# Altium PCB Complete_PCB.PcbDoc
Units mil, origin at the board's own origin, x right, y up, seen from the top; angles counter-clockwise.
Board outline 6000 x 4000 mil, 2 copper layers (Top Layer, Bottom Layer); 4 components, 12 nets, 67 pads, 0 vias.
Unrouted connection lines stored in the file: 21.
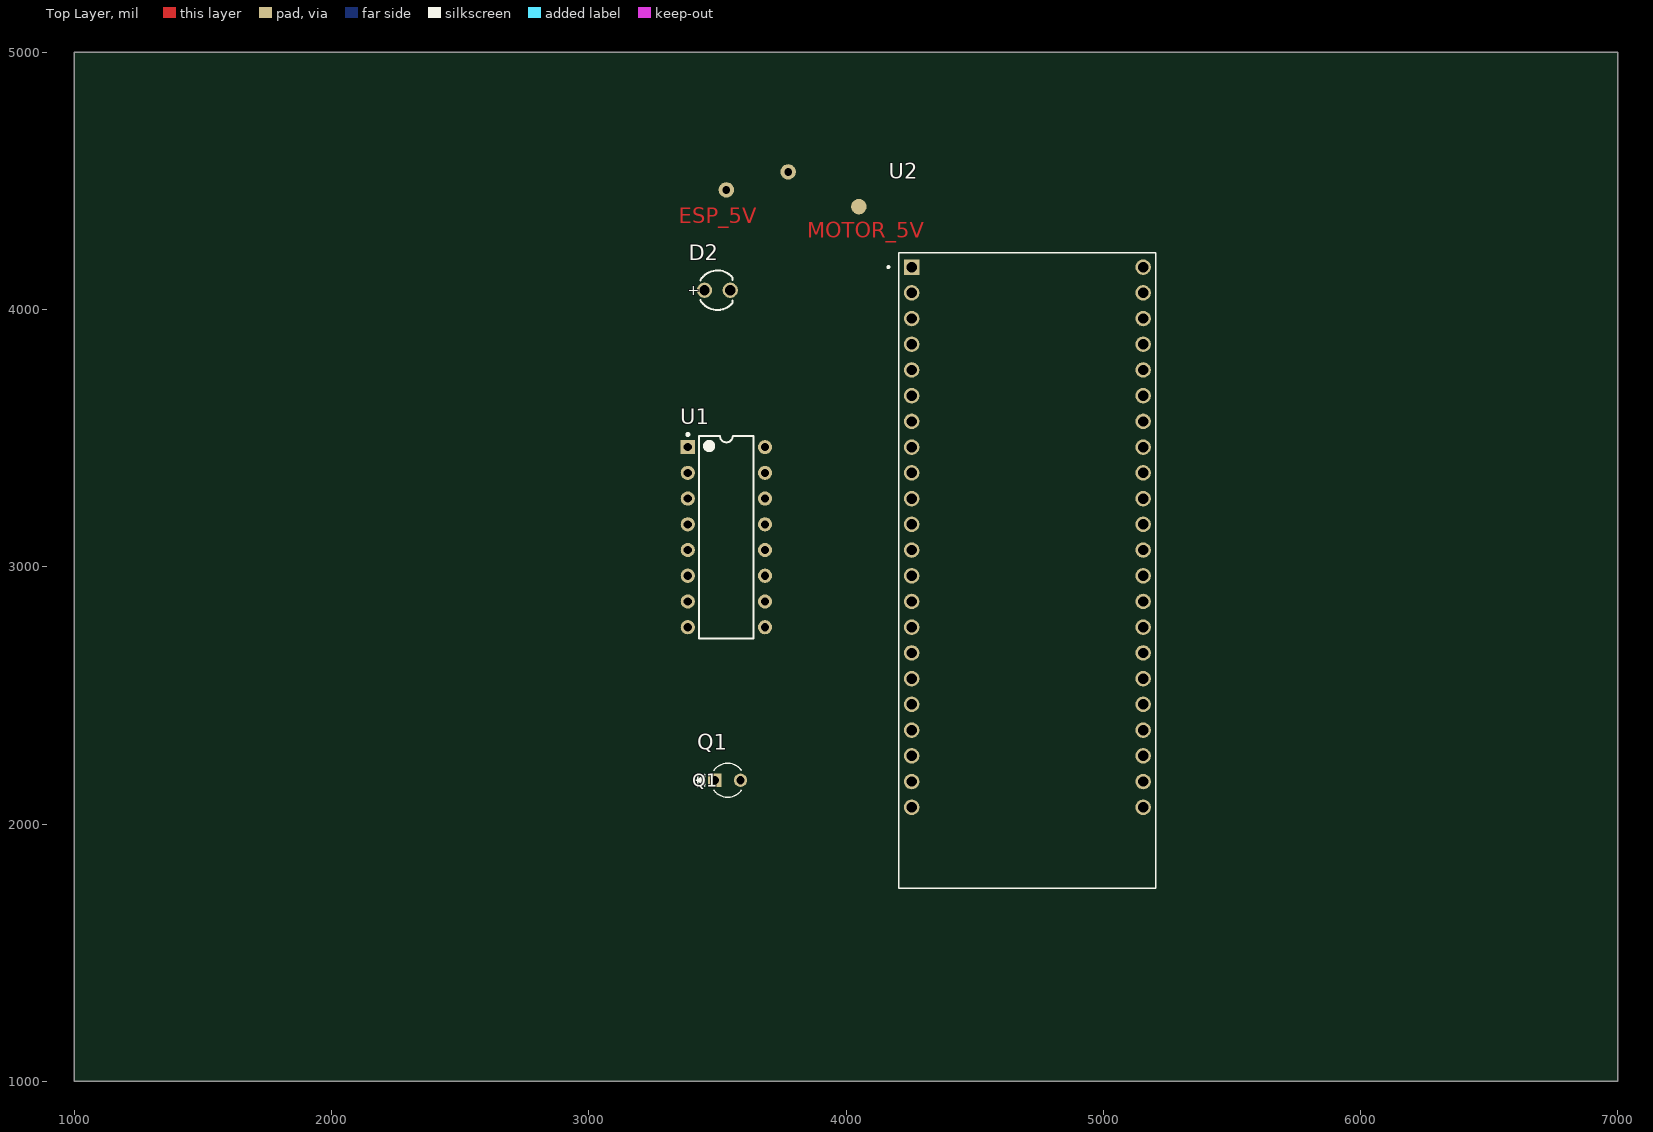
[diagram p0: Top Layer view]
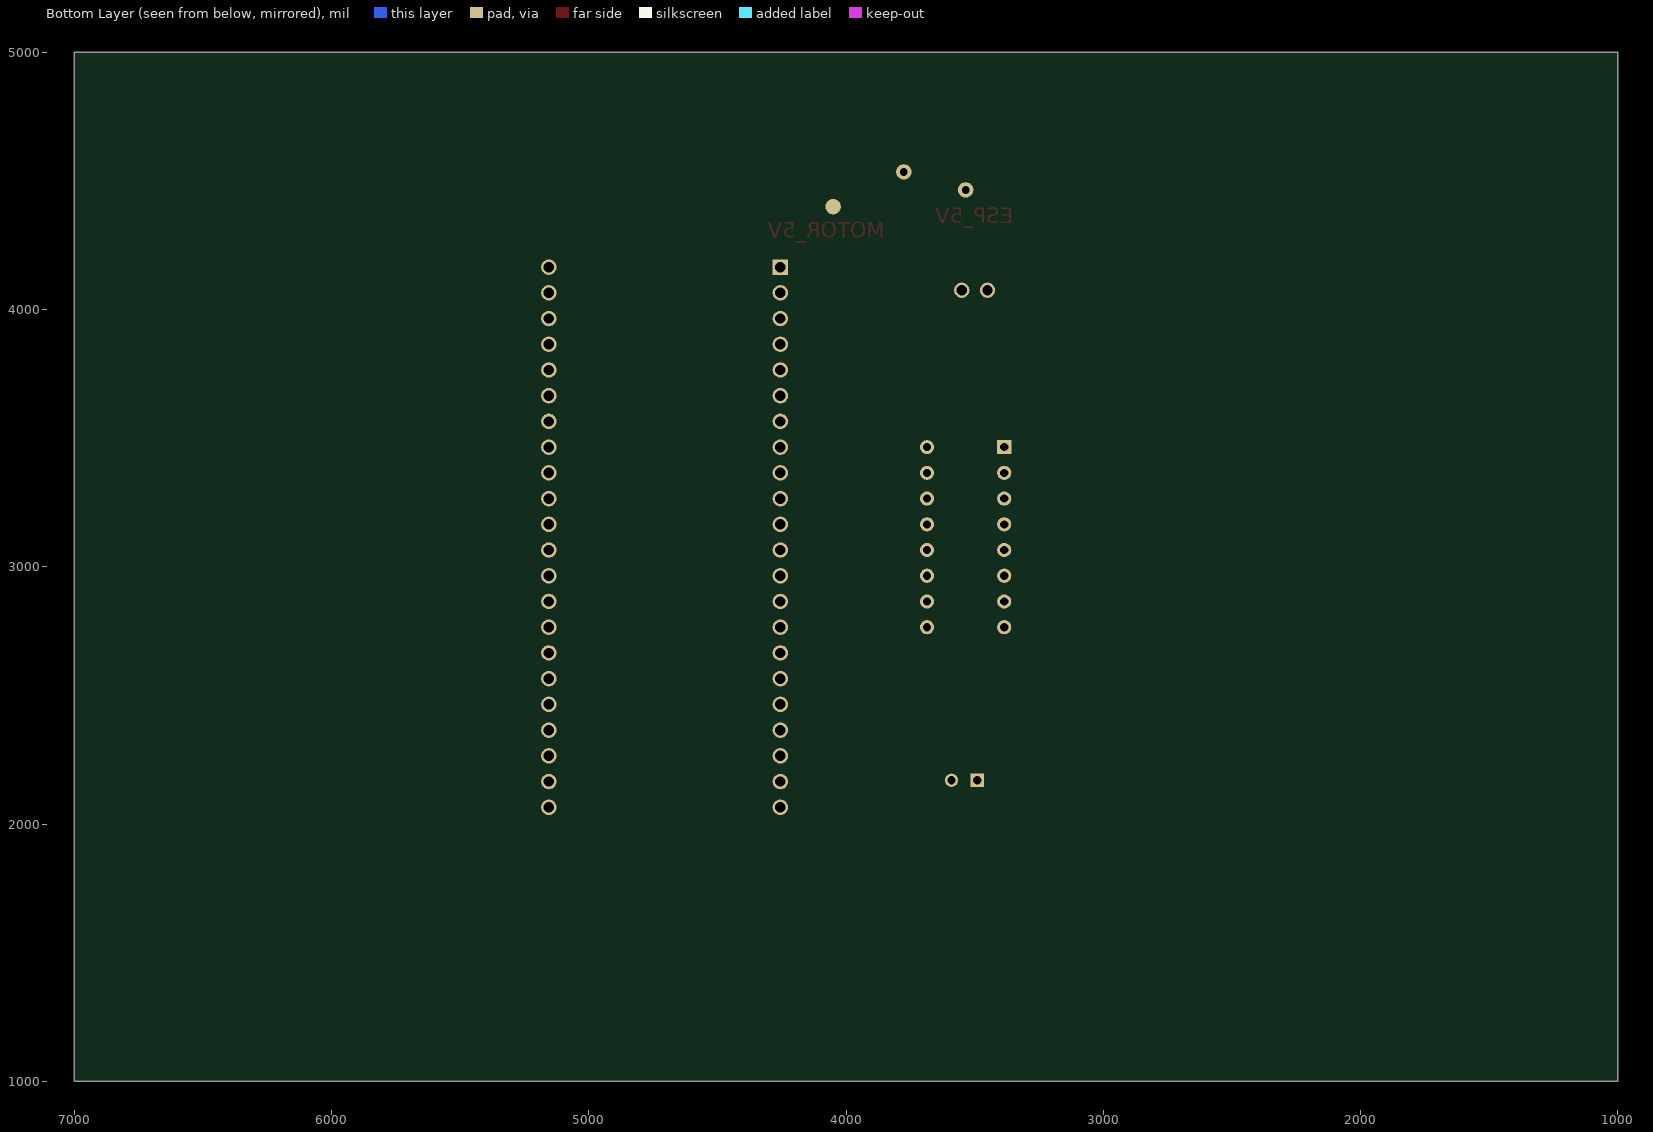
[diagram p1: Bottom Layer view, seen from below]

## Layer stack, top to bottom
Top Solder: solder mask 0.4, Solder Resist, Dk 3.5
Top Layer: signal copper 1.4
Dielectric 1: dielectric 12.6, FR-4, Dk 4.8
Bottom Layer: signal copper 1.4
Bottom Solder: solder mask 0.4, Solder Resist, Dk 3.5

## Board outline
1000,1000 7000,1000 7000,5000 1000,5000

## Design rules (kind name [scope] priority, off if disabled: settings)
Clearance [All] p1: gap=10 ignorepadtopadclearanceinfootprint=FALSE
PolygonConnect [All] p1: connectstyle=Relief reliefconductorwidth=10 reliefentries=4 polygonreliefangle="90 Angle" airgapwidth=10
RoutingVias [All] p1: holewidth=28 width=50 viastyle="Through Hole" minholewidth=28 minwidth=50 maxholewidth=28 maxwidth=50
SolderMaskExpansion [All] p1: expansion=0 istentingtop=FALSE
SupplyNets "Schematic Supply Nets_1" [InNet('ESP_5V')] p1: voltage=0.000
Width [All] p1: maxlimit=10 minlimit=10 preferedwidth=10
30 further rules are at their usual default settings.

## Components (designator, comment, footprint, x,y, rotation, side; value= is the part's Value field where it differs from the comment)
D2 "L34F3C" WL-TIRW_D3.9H5.3 53500,54075 r0 top
Q1 "TEPT4400" LED_TEPT4400_VIS 3490,2170 r0 top
U1 "L293D" STM-L293D-16 3535,3115 r0 top
U2 "ESP32-S3-DEVKITC" XCVR_ESP32-S3-DEVKITC-1-N16R8V 4705,2985.08 r0 top

## Footprints (in the part's own frame and the unit in brackets; to place one, negate y for a bottom-side part, rotate by r counter-clockwise, add the part's x,y. Pads: shape width x height; smd on the part's side, far side on the other; paste and mask are expansions set on the pad)
LED_TEPT4400_VIS [mil]
  rect 52x52 hole 32 paste-99999 mask+0: 1(0,0)
  round 52 hole 32 paste-99999 mask+0: 2(100,0)
  silkscreen extent -76,-66 103,66, body extent -11,-61 111,61, height 178
STM-L293D-16 [mm] "DIP, 16-Leads, Body 20x6.85mm, Pitch 2.54mm"
  rect 1.4x1.4 hole 0.8: 1(-3.81,8.89)
  round 1.4 hole 0.8: 2(-3.81,6.35) 3(-3.81,3.81) 4(-3.81,1.27) 5(-3.81,-1.27) 6(-3.81,-3.81) 7(-3.81,-6.35) 8(-3.81,-8.89) 9(3.81,-8.89) 10(3.81,-6.35) 11(3.81,-3.81) 12(3.81,-1.27) 13(3.81,1.27) 14(3.81,3.81) 15(3.81,6.35) 16(3.81,8.89)
  silkscreen extent -3.93,-10 2.7,10.26, body extent -3.93,-10 3.93,10, height 5.1
WL-TIRW_D3.9H5.3 [mm] "THT Infrared Round Waterclear, body diameter 3.9mm"
  round 1.5 hole 1: 1(-1268.73,-1270) 2(-1271.27,-1270)
  silkscreen extent -1271.69,-1271.95 -1268.5,-1268.05, body extent -1271.95,-1271.95 -1268.38,-1268.05, height 5.33
XCVR_ESP32-S3-DEVKITC-1-N16R8V [mm]
  rect 1.53x1.53 / inner round 1.53 / far side rect 1.53x1.53 hole 1.02 mask+0.102: J1_1(-11.43,29.97)
  round 1.53 hole 1.02 mask+0.102: J1_2(-11.43,27.43) J1_3(-11.43,24.89) J1_4(-11.43,22.35) J1_5(-11.43,19.81) J1_6(-11.43,17.27) J1_7(-11.43,14.73) J1_8(-11.43,12.19) J1_9(-11.43,9.65) J1_10(-11.43,7.11) J1_11(-11.43,4.57) J1_12(-11.43,2.03) J1_13(-11.43,-0.51) J1_14(-11.43,-3.05) J1_15(-11.43,-5.59) J1_16(-11.43,-8.13) J1_17(-11.43,-10.67) J1_18(-11.43,-13.21) J1_19(-11.43,-15.75) J1_20(-11.43,-18.29) J1_21(-11.43,-20.83) J1_22(-11.43,-23.37) J3_1(11.43,29.97) J3_2(11.43,27.43) J3_3(11.43,24.89) J3_4(11.43,22.35) J3_5(11.43,19.81) J3_6(11.43,17.27) J3_7(11.43,14.73) J3_8(11.43,12.19) J3_9(11.43,9.65) J3_10(11.43,7.11) J3_11(11.43,4.57) J3_12(11.43,2.03) J3_13(11.43,-0.51) J3_14(11.43,-3.05) J3_15(11.43,-5.59) J3_16(11.43,-8.13) J3_17(11.43,-10.67) J3_18(11.43,-13.21) J3_19(11.43,-15.75) J3_20(11.43,-18.29) J3_21(11.43,-20.83) J3_22(11.43,-23.37)
  silkscreen extent -13.82,-31.37 12.7,31.37, body extent -12.7,-31.96 12.7,37.68, height 7.39

## Part data
D2: library part CMP-03913-82270983-2, "WL-TIRW THT Infrared Round Waterclear", Forward Current=1A, Forward Voltage=1.5V, Manufacturer Lifecycle Status=ACTIVE, Max Operating Temperature=85°C, Max Reverse Voltage (DC)=5V, Min Operating Temperature=-40°C, Height=5.3mm, Length=3mm, Lifecycle Status=Production, Packaging=Bulk, Peak Wavelength=850nm, RoHS=Compliant, Viewing Angle=35°, Wavelength=850nm, Width=2.54mm, YEOL="1 = Estimated lifetime > 10 years"
Q1: "PHOTO TRANS. 3MM  30DEG-e4", Manufacturer_Name=Vishay, Copyright="Copyright (C) 2026 Ultra Librarian. All rights reserved.", Datasheet=https://www.vishay.com/doc?81341, Manufacturer_Part_Number=TEPT4400
U1: library part CMP-2000-06524-1, "Push-Pull Four Channel Driver with Diode, 4.5 to 36 V, -40 to 150 degC, 16-Pin PDIP, RoHS, Tube", Current - Output / Channel=600mA, Current - Peak Output=1.2A, Manufacturer=STMicroelectronics, On-State Resistance=-, Operating Temperature=-40°C~150°C, Package / Case="16-DIP(0.300\",7.62mm)", Package Description="16-Pin Thru-Hole Dual-In-Line, Body 20 x 6.85 mm, Pitch 2.54 mm", Package Reference=DIP-16, Standard Package=25, Supplier Device Package=16-PowerDIP, Voltage - Supply=4.5V~36V, Category=IntegratedCircuits(ICs), Datasheet URL=http://www.st.com/st-web-ui/static/active/en/resource/technical/document/datasheet/CD00000059.pdf, Datasheet Version=07/2003, Dynamic Catalog=HalfBridge, Family=PMIC-MOSFET,BridgeDrivers-InternalSwitch, Input Type=Non-Inverting, Manufacturer URL=http://www.st.com/, Mounting Technology=ThroughHole, Mounting Type=ThroughHole, Number of Outputs=4, Other Names=497-2936-5, Other Related Documents=L293DViewAllSpecifications, Packaging=Tube, PartNumber=L293D, Series=-, Type=HalfBridge
U2: library part ESP32-S3-DEVKITC-1-N16R8V, "Development Boards & Kits - Wireless Gen-Purpose Dev Board, embeds ESP32-S3-WROOM-2-N16R8V, 16 MB Octal Flash, 8 MB Octal PSRAM, with Pin Header", Package=None, Check_prices=https://www.snapeda.com/parts/ESP32-S3-DEVKITC-1-N16R8V/Espressif+Systems/view-part/?ref=eda, MF="Espressif Systems", MP=ESP32-S3-DEVKITC-1-N16R8V, SnapEDA_Link=https://www.snapeda.com/parts/ESP32-S3-DEVKITC-1-N16R8V/Espressif+Systems/view-part/?ref=snap

## Free pads (board coordinates)
  round 60 hole 30: 1(3775,4535) 3(3535,4465)
  round 60 all layers, no hole: 2(4050,4400)

## Nets (pads, with @x,y where several pads share a name; then routed paths per layer and width w, separated by ;. In a path a pad name is that pad's centre, name@x,y a point inside that pad or via, vN(x,y) a via of type N, cw(c..) or ccw(c..) an arc to the next point about the centre after c; other vN are vias at no path point)
DIST_SENSE: D2.2 U2.J1_15
ESP_5V: D2.1 pad.3 Q1.1 U1.1 U1.4 U1.5 U1.8 U1.9 U1.12 U1.13 U2.J1_21 U2.J1_22 U2.J3_1 U2.J3_21 U2.J3_22
GPIO_1: U1.2 U2.J1_4
GPIO_2: U1.7 U2.J1_5
GPIO_3: U1.10 U2.J1_6
GPIO_4: U1.15 U2.J1_7
LIGHT_SENSE: Q1.2 U2.J1_12
M1_A: U1.3
M1_B: U1.6
M2_A: U1.11
M2_B: U1.14
MOTOR_V: pad.2 U1.16
pads on no net: U2.J1_1 U2.J1_2 U2.J1_3 U2.J1_8 U2.J1_9 U2.J1_10 U2.J1_11 U2.J1_13 U2.J1_14 U2.J1_16 U2.J1_17 U2.J1_18 U2.J1_19 U2.J1_20 U2.J3_2 U2.J3_3 U2.J3_4 U2.J3_5 U2.J3_6 U2.J3_7 U2.J3_8 U2.J3_9 U2.J3_10 U2.J3_11 U2.J3_12 U2.J3_13 U2.J3_14 U2.J3_15 U2.J3_16 U2.J3_17 U2.J3_18 U2.J3_19 U2.J3_20

## Other copper
Top Layer:
  text "ESP_5V" at 3350,4335 h60
  text "MOTOR_5V" at 3850,4280 h60

## Text inside footprints (layer, text, board x,y; h text height)
D2: Top Overlay "+" at 3383.86,4055.32 h40